# EAGLE board arduino-DIP (EAGLE 6.6.0)

Size 10.16 x 0 mm. Coordinates in mm from the lower left corner, seen from the top.
Copper layers (1*16): Top 0.0178mm / dielectric 59mil / Bottom 0.0178mm
Design rules "sunstone-2lyr_v1.0.0.3": minimum track width 6mil, minimum drill 14mil, track to track 6mil, track to pad 6mil, pad to pad 6mil, via to via 6mil, smd to smd 6mil, copper to edge 20mil, drill to drill 16mil, minimum pad ring 8mil, minimum via ring 8mil, stop-mask expansion 3mil, vias tented up to drill 50mil, thermal gap 10mil
Net classes: 0 default: width 0.254 mm, clearance 0.254 mm; 1 power: width 0.61 mm, drill 0.61 mm, clearance 0.254 mm; 2 gnd: width 0.305 mm, drill 0.559 mm, clearance 0.254 mm; 3 usbvcc: width 0.508 mm, drill 0.61 mm, clearance 0.254 mm; 4 aref: width 0.406 mm, drill 0.61 mm, clearance 0.254 mm
Holes 3.2 mm at 68.45,150.5 68.45,122.56 17.65,165.74 16.38,117.48
vRestrict: area 25.3,159 to 27.1,164.1; area 27.8,160.4 to 29.5,164.1; area 30.9,160.3 to 32,163.7; area 33.4,160.3 to 34.5,163.7; area 35.9,160.3 to 37.1,163.7; area 38.5,160.3 to 39.6,163.7; area 41.1,162.2 to 42.3,163.7; area 42.7,160 to 50,161.8; area 62.7,159.1 to 64.1,161.7; area 65.3,159.1 to 66.7,161.7; area 63.8,150.7 to 67.2,152.1; area 3,136.8 to 4.4,145; area 8.1,137.5 to 9.8,145; area 50.3,125.2 to 50.9,125.7; area 52.8,125.1 to 53.3,126; area 13.7,143.8 to 15.1,146.1; area 47.2,162.4 to 48.5,163.8; area 50,162.3 to 51.2,163.8; area 52.6,162.3 to 53.7,163.8; area 55.2,162.3 to 56.4,163.8; area 57.7,162.3 to 58.8,163.8; area 60.3,162.3 to 61.5,163.8; area 62.9,162.3 to 64,163.8; area 65.4,162.3 to 66.5,163.8; area 43.7,162.2 to 44.8,163.7; area 2.7,127.4 to 11.8,139.4

## Footprints (pad centres in the part's own frame; a part is rotated, then mirrored left to right if it is on the bottom)
1X06 = drill 0.85 pad 1.422 long: 1 -6.35,0; 2 -3.81,0; 3 -1.27,0; 4 1.27,0; 5 3.81,0; 6 6.35,0
C0603-ROUND = smd 0.898 x 1.1: 1 -0.889,0; 2 0.889,0
0603_CAP = smd 0.7 x 1: 1 -0.65,0; 2 0.65,0
0402_DIODE = smd 0.536 x 0.546: ANODE -0.433,0; CATHODE 0.433,0
MINIMELF = smd 1.4 x 1.8: A 1.7,0; C -1.7,0
L1812 = smd 1.9 x 3.4: 1 -1.95,0; 2 1.95,0
SJ = smd 1.168 x 1.6: 1 -0.762,0; 2 0.762,0
2X03 = drill 0.95 pad 1.55 octagon: 1 -2.54,-1.27; 2 -2.54,1.27; 3 0,-1.27; 4 0,1.27; 5 2.54,-1.27; 6 2.54,1.27
1X10 = drill 0.85 pad 1.422 long: 1 -11.43,0; 2 -8.89,0; 3 -6.35,0; 4 -3.81,0; 5 -1.27,0; 6 1.27,0; 7 3.81,0; 8 6.35,0; 9 8.89,0; 10 11.43,0
1X08 = drill 0.85 pad 1.422 long: 1 -8.89,0; 2 -6.35,0; 3 -3.81,0; 4 -1.27,0; 5 1.27,0; 6 3.81,0; 7 6.35,0; 8 8.89,0
MODULE_GENERIC = drill 0.991 square: 1 7.62,29.21 | drill 0.991 octagon: 2 7.62,26.67; 3 5.08,29.21; 4 5.08,26.67; 5 2.54,29.21; 6 2.54,26.67; 7 0,29.21; 8 0,26.67; 9 -2.54,29.21; 10 -2.54,26.67; 11 -5.08,29.21; 12 -5.08,26.67; 13 -7.62,29.21; 14 -7.62,26.67
USB_MICRO_B-HIROSE-ZX62-B-5PA(11) = smd 0.4 x 1.35: 1 -1.3,4.125; 2 -0.65,4.125; 3 0,4.125; 4 0.65,4.125; 5 1.3,4.125 | smd 2.1 x 2: P$1 3.1,3.8; P$2 -3.1,3.8 | smd 1.8 x 1.9: P$3 -4,1.45; P$6 4,1.45 | smd 1.9 x 1.9: P$4 -1.2,1.45; P$5 1.2,1.45
2X02 = drill 0.95 pad 1.676 octagon: 1 -1.27,-1.27; 2 -1.27,1.27; 3 1.27,-1.27; 4 1.27,1.27
1X03 = drill 1.016 long: 1 -2.54,0; 2 0,0; 3 2.54,0
CHIP-LED0805 = smd 1.2 x 1.2: A 0,-1.05; C 0,1.05
0805 = smd 1.2 x 1: 1 -1.1,0; 2 1.1,0
XFL4015 = smd 0.965 x 3.404: 1 -1.181,0; 2 1.181,0
R0603-ROUND = smd 0.898 x 1.1: 1 -0.889,0; 2 0.889,0
0603-RES = smd 0.7 x 1: 1 -0.65,0; 2 0.65,0
CAY16 = smd 0.5 x 0.65: 1 -1.2,-0.675; 2 -0.4,-0.675; 3 0.4,-0.675; 4 1.2,-0.675; 5 1.2,0.675; 6 0.4,0.675; 7 -0.4,0.675; 8 -1.2,0.675
MFS401N-2-Z = drill 0.8: 1 -5,1.25; 2 -3,1.25; 3 -1,1.25; 4 1,1.25; 5 3,1.25; 6 5,1.25; 7 -5,-1.25; 8 -3,-1.25; 9 -1,-1.25; 10 1,-1.25; 11 3,-1.25; 12 5,-1.25
EVQP2 = smd 1.676 x 0.813: P$1 -2.54,-0.87; P$2 -2.54,0.908; P$3 2.54,-0.87; P$4 2.54,0.908
MLF32 = smd 0.7 x 0.28: 1 -2.45,1.75; 2 -2.45,1.25; 3 -2.45,0.75; 4 -2.45,0.25; 5 -2.45,-0.25; 6 -2.45,-0.75; 7 -2.45,-1.25; 8 -2.45,-1.75; 17 2.45,-1.75; 18 2.45,-1.25; 19 2.45,-0.75; 20 2.45,-0.25; 21 2.45,0.25; 22 2.45,0.75; 23 2.45,1.25; 24 2.45,1.75 | smd 0.28 x 0.7: 9 -1.75,-2.45; 10 -1.25,-2.45; 11 -0.75,-2.45; 12 -0.25,-2.45; 13 0.25,-2.45; 14 0.75,-2.45; 15 1.25,-2.45; 16 1.75,-2.45; 25 1.75,2.45; 26 1.25,2.45; 27 0.75,2.45; 28 0.25,2.45; 29 -0.25,2.45; 30 -0.75,2.45; 31 -1.25,2.45; 32 -1.75,2.45 | smd 3.254 x 3.254: 33 0,0
MSOP08 = smd 0.3 x 1.2: 1 -0.976,-2.113; 2 -0.326,-2.113; 3 0.324,-2.113; 4 0.974,-2.113; 5 0.974,2.112; 6 0.324,2.112; 7 -0.326,2.112; 8 -0.976,2.112
RLT0007A = smd 0.6 x 0.25: 1 -0.9,0.75; 2 -0.9,0.25; 3 -0.9,-0.25; 4 -0.9,-0.75 | smd 1.5 x 0.3: 5 0.45,-0.6; 6 0.45,0; 7 0.45,0.6
QS = drill 0.85 pad 1.676 octagon: 1 -2.54,0; 2 2.54,0
RESONATOR = smd 0.7 x 2: 1 -1,0; 2 0,0; 3 1,0
CT/CN0603 = smd 1 x 1: 1 -1,0; 2 1,0
DIL28-3 = drill 0.85 pad 1.422 long: 1 -16.51,-3.81; 2 -13.97,-3.81; 3 -11.43,-3.81; 4 -8.89,-3.81; 5 -6.35,-3.81; 6 -3.81,-3.81; 7 -1.27,-3.81; 8 1.27,-3.81; 9 3.81,-3.81; 10 6.35,-3.81; 11 8.89,-3.81; 12 11.43,-3.81; 13 13.97,-3.81; 14 16.51,-3.81; 15 16.51,3.81; 16 13.97,3.81; 17 11.43,3.81; 18 8.89,3.81; 19 6.35,3.81; 20 3.81,3.81; 21 1.27,3.81; 22 -1.27,3.81; 23 -3.81,3.81; 24 -6.35,3.81; 25 -8.89,3.81; 26 -11.43,3.81; 27 -13.97,3.81; 28 -16.51,3.81

## Placement (x,y rotation side)
AD  6x1F-H8.5  [1X06]  59.56,117.48 0 top  (outside the outline)
C1  100n  [C0603-ROUND]  -19.18,130.18 270 top  (outside the outline)
C4  100n  [C0603-ROUND]  -9.65,159.26 180 top  (outside the outline)
C5  100n  [C0603-ROUND]  -9.65,144.65 0 top  (outside the outline)
C6  100n  [C0603-ROUND]  45.85,125.35 180 top  (outside the outline)
C7  100n  [C0603-ROUND]  -9.65,146.3 0 top  (outside the outline)
C8  1u  [C0603-ROUND]  -24.89,156.72 180 top  (outside the outline)
C9  22p  [C0603-ROUND]  -21.59,144.4 180 top  (outside the outline)
C10  10uF  [0603_CAP]  50.67,91.19 0 top  (outside the outline)
C11  22p  [C0603-ROUND]  -15.37,144.4 0 top  (outside the outline)
C12  22uF  [0603_CAP]  54.23,91.19 0 top  (outside the outline)
D1  DIODE  [0402_DIODE]  -8.76,-4.19 0 top  (outside the outline)
D2  CD1206-S01575  [MINIMELF]  61.85,142.88 270 top  (outside the outline)
D3  CD1206-S01575  [MINIMELF]  -24.51,161.04 90 top  (outside the outline)
F1  MF-MSMF050-2 500mA  [L1812]  -33.53,141.35 90 top  (outside the outline)
GROUND  [SJ]  -26.16,155.45 0 bottom  (outside the outline)
ICSP  3x2 M  [2X03]  67.31,142.88 270 top  (outside the outline)
ICSP1  3x2 M  [2X03]  96.9,169.29 180 top  (outside the outline)
IOH  10x1F-H8.5  [1X10]  32.64,165.74 180 top  (outside the outline)
IOL  8x1F-H8.5  [1X08]  57.02,165.74 180 top  (outside the outline)
J1  MODULE_GENERIC  [MODULE_GENERIC]  36.83,141.61 90 top  (outside the outline)
J4  MICRO_USB_B_HIROSE_ZX62-B-5PA(11)  [USB_MICRO_B-HIROSE-ZX62-B-5PA(11)]  5.08,0 0 top
JP2  2x2 M - NM  [2X02]  -18.03,155.96 90 top  (outside the outline)
JP5  [1X03]  40.26,89.79 0 top  (outside the outline)
L  YELLOW  [CHIP-LED0805]  -9.65,156.97 270 top  (outside the outline)
L1  BLM21  [0805]  -29.97,159.89 180 top  (outside the outline)
L2  0.47uH  [XFL4015]  46.86,91.31 0 top  (outside the outline)
ON  GREEN  [CHIP-LED0805]  60.83,151.51 270 top  (outside the outline)
POWER  8x1F-H8.5  [1X08]  39.24,117.48 0 top  (outside the outline)
R1  1M  [R0603-ROUND]  -18.54,144.4 0 top  (outside the outline)
R2  1M  [R0603-ROUND]  43.69,137.67 180 top  (outside the outline)
R3  1MΩ  [0603-RES]  57.28,91.19 0 top  (outside the outline)
RESET-EN  [SJ]  -9.65,142.11 0 top  (outside the outline)
RN1  10K  [CAY16]  -9.65,138.68 90 top  (outside the outline)
RN2  1K  [CAY16]  -9.65,154.18 270 top  (outside the outline)
RN3  22R  [CAY16]  -24.77,151.64 90 top  (outside the outline)
RN4  1K  [CAY16]  60.83,148.72 90 top  (outside the outline)
RX  YELLOW  [CHIP-LED0805]  -9.65,149.1 90 top  (outside the outline)
S1  MFS401N-2-Z  [MFS401N-2-Z]  -3.05,-10.41 0 top  (outside the outline)
S2  EVQP2  [EVQP2]  -6.22,-19.69 0 top  (outside the outline)
TX  YELLOW  [CHIP-LED0805]  -9.65,151.38 90 top  (outside the outline)
U3  ATMEGA16U2-MU(R)  [MLF32]  -17.65,149.48 90 top  (outside the outline)
U5  LMV358IDGKR  [MSOP08]  -18.54,135.13 90 top  (outside the outline)
VR1  TPS62086  [RLT0007A]  31.75,90.68 0 top  (outside the outline)
Y1  16MHz  [QS]  -18.67,140.97 180 top  (outside the outline)
Y2  CSTCE16M0V53-R0 16MHZ  [RESONATOR]  43.69,139.83 0 top  (outside the outline)
Z1  CG0603MLC-05E  [CT/CN0603]  -24.89,154.18 180 top  (outside the outline)
Z2  CG0603MLC-05E  [CT/CN0603]  -24.89,148.46 180 top  (outside the outline)
ZU4  ATMEGA328P-PU  [DIL28-3]  48.77,131.32 180 top  (outside the outline)

## Library data of the parts
AD C1 C4-C9 C11 ICSP ICSP1 IOH IOL JP2 POWER R1 R2 U3 ZU4 = SmartPrj
C10 = passives; DIGIKEY: 445-6853-1-ND
C12 = passives; DIGIKEY: 445-9077-1-ND
D1 = passives; DIGIKEY: P18981CT-ND
D2 D3 = diode
F1 = rcl; DIGIKEY: MF-MSMF050-2CT-ND
GROUND RESET-EN = jumper
J1 = signpost; DIGIKEY: S9170-ND
J4 = connector; DIGIKEY: H11634CT-ND; MOUSER: 798-ZX62-B-5PA11; NEWARK: 86P8793
JP5 = pinhead
L ON RX TX = led
L1 = wuerth-elektronik; DIGIKEY: 490-1054-1-ND
L2 = passives; COILCRAFT: XFL4015-471ME
R3 = passives
RN1 RN2 RN4 = resistor-dil
RN3 = resistor-dil; DIGIKEY: CAY16-220J4LFCT-ND
S1 = switches; DIGIKEY: 563-1568-ND
S2 = switches; DIGIKEY: P11084SCT-ND
U5 = linear
VR1 = regulators; DIGIKEY: 296-40831-1-ND
Y1 = SmartPrj; DIGIKEY: 535-9041-ND
Y2 = SmartPrj; DIGIKEY: 490-1198-1-ND
Z1 Z2 = varistor; DIGIKEY: CG0603MLC-05ECT-ND

## Nets
+3V3: C12.1 JP5.3 L2.2 POWER.4 R3.2 VR1.3 VR1.4
+5V [usbvcc]: C1.2 C6.2 C7.1 D1.CATHODE D2.C D3.C ICSP1.2 ICSP.2 POWER.2 POWER.5 RN1.3 RN1.5 RN2.2 RN2.3 RN4.3 RN4.4 U3.4 U3.32 U5.8 ZU4.7 ZU4.20
AD0: AD.1 ZU4.23
AD1: AD.2 ZU4.24
AD2: AD.3 ZU4.25
AD3: AD.4 ZU4.26
AD4/SDA: AD.5 IOH.9 ZU4.27
AD5/SCL: AD.6 IOH.10 ZU4.28
ARD_USB_D+: RN3.5 S1.8 Z1.1
ARD_USB_D-: RN3.8 S1.5 Z2.1
ARD_USB_GND [gnd]: C8.2 GROUND.2 L1.1 S1.11 U3.28
ARD_USB_VBUS [usbvcc]: D1.ANODE F1.2 S1.2
AREF [aref]: C4.2 IOH.8 ZU4.21
DTR: C5.1 RN2.4 U3.13
EXT_USB_D+: J4.3 S1.9
EXT_USB_D-: J4.2 S1.6
EXT_USB_GND: J4.5 S1.12
EXT_USB_ID: J4.4
EXT_USB_VBUS: J4.1 S1.3
GND [gnd]: C1.1 C4.1 C6.1 C7.2 C9.2 C10.2 C11.2 C12.2 GROUND.1 ICSP1.6 ICSP.6 IOH.7 J1.1 J1.14 L.C ON.C POWER.6 POWER.7 RN2.5 S1.10 S2.P$1 S2.P$3 U3.3 U3.33 U5.4 VR1.5 Y2.2 ZU4.8 ZU4.22
IO0: IOL.1 RN4.2 ZU4.2
IO1: IOL.2 RN4.1 ZU4.3
IO2: IOL.3 ZU4.4
IO3: IOL.4 ZU4.5
IO4: IOL.5 ZU4.6
IO5: IOL.6 ZU4.11
IO6: IOL.7 ZU4.12
IO7: IOL.8 ZU4.13
IO8: IOH.1 ZU4.14
IO9: IOH.2 ZU4.15
L13: RN2.8 U5.6 U5.7
M8RXD: RN4.7 U3.9
M8TXD: RN4.8 U3.8
MISO: ICSP.1 IOH.5 ZU4.18
MISO2: ICSP1.1 U3.17
MOD_5V: C10.1 J1.2 JP5.1 VR1.1 VR1.7
MOD_IN: J1.10
MOD_OUT: J1.8
MOD_PPS: J1.7
MOD_SCL: J1.5
MOD_SDA: J1.6
MOD_USB_D+: J1.11 S1.7
MOD_USB_D-: J1.12 S1.4
MOD_USB_VBUS: J1.13 S1.1
MOD_VCCIO: J1.4 JP5.2
MOSI: ICSP.4 IOH.4 ZU4.17
MOSI2: ICSP1.4 U3.16
N$1: L.A RN2.1
N$2: L2.1 VR1.6
N$3: ON.A RN4.5 RN4.6
N$35: RN2.7 RX.A
N$36: RN2.6 TX.A
PB4: JP2.1 U3.18
PB5: JP2.3 U3.19
PB6: JP2.2 U3.20
PB7: JP2.4 U3.21
POWER_GOOD: R3.1 VR1.2
RD+: RN3.4 U3.29
RD-: RN3.1 U3.30
RESET: C5.2 D2.A ICSP.5 POWER.3 RESET-EN.1 RESET-EN.2 RN1.4 S2.P$2 S2.P$4 ZU4.1
RESET2: D3.A ICSP1.5 RN1.6 U3.24
RXLED: RX.C U3.10
SCK: ICSP.3 IOH.6 U5.5 ZU4.19
SCK2: ICSP1.3 U3.15
SS: IOH.3 ZU4.16
TP_VUCAP: C8.1 U3.27
TXLED: TX.C U3.11
USBVCC [usbvcc]: F1.1 U3.31
USHIELD [gnd]: L1.2 Z1.2 Z2.2
VIN [power]: POWER.8
XT1: C9.1 R1.1 U3.1 Y1.2
XT2: C11.1 R1.2 U3.2 Y1.1
XTAL1: R2.1 Y2.3 ZU4.9
XTAL2: R2.2 Y2.1 ZU4.10

## Tracks (layer width: path | path; a pad name or v marks a point on that pad's centre or on a via)
+3V3  (6 unrouted)
+5V  (20 unrouted)
AD0  (1 unrouted)
AD1  (1 unrouted)
AD2  (1 unrouted)
AD3  (1 unrouted)
AD4/SDA  (2 unrouted)
AD5/SCL  (2 unrouted)
ARD_USB_D+  (2 unrouted)
ARD_USB_D-  (2 unrouted)
ARD_USB_GND  (4 unrouted)
ARD_USB_VBUS  (2 unrouted)
AREF  (2 unrouted)
DTR  (2 unrouted)
EXT_USB_D+  (1 unrouted)
EXT_USB_D-  (1 unrouted)
EXT_USB_GND  (1 unrouted)
EXT_USB_VBUS  (1 unrouted)
GND  (28 unrouted)
IO0  (2 unrouted)
IO1  (2 unrouted)
IO2  (1 unrouted)
IO3  (1 unrouted)
IO4  (1 unrouted)
IO5  (1 unrouted)
IO6  (1 unrouted)
IO7  (1 unrouted)
IO8  (1 unrouted)
IO9  (1 unrouted)
L13  (2 unrouted)
M8RXD  (1 unrouted)
M8TXD  (1 unrouted)
MISO  (2 unrouted)
MISO2  (1 unrouted)
MOD_5V  (4 unrouted)
MOD_USB_D+  (1 unrouted)
MOD_USB_D-  (1 unrouted)
MOD_USB_VBUS  (1 unrouted)
MOD_VCCIO  (1 unrouted)
MOSI  (2 unrouted)
MOSI2  (1 unrouted)
N$1  (1 unrouted)
N$2  (1 unrouted)
N$3  (2 unrouted)
N$35  (1 unrouted)
N$36  (1 unrouted)
PB4  (1 unrouted)
PB5  (1 unrouted)
PB6  (1 unrouted)
PB7  (1 unrouted)
POWER_GOOD  (1 unrouted)
RD+  (1 unrouted)
RD-  (1 unrouted)
RESET  (9 unrouted)
RESET2  (3 unrouted)
RXLED  (1 unrouted)
SCK  (3 unrouted)
SCK2  (1 unrouted)
SS  (1 unrouted)
TP_VUCAP  (1 unrouted)
TXLED  (1 unrouted)
USBVCC  (1 unrouted)
USHIELD  (2 unrouted)
XT1  (3 unrouted)
XT2  (3 unrouted)
XTAL1  (2 unrouted)
XTAL2  (2 unrouted)

## Text on the board
tPlace: 13 | 12 | 11 | 10 | 9 | 8 | 7 | 6 | 5 | 4 | 3 | 2 | 1 | 0 | MADE IN | ITALY | Prototype | Limited | Edition
tNames: SCL | SDA | M.Banzi | D.Cuartielles | T.Igoe | AREF | GND | G.Martino | # | # | # | # | D.Mellis | # | # | DIGITAL | [#=PWM] | TX | RX | TM | TX | Arduino | RX | UNO | www.arduino.cc | 1 | ANALOG IN | IOREF | RESET | 3V3 | 5V | GND | VIN | A0 | A1 | A2 | A3 | A4 | A5
bNames: MADE IN | designed by | MADE IN | ITALY | tinker it | ITALY | designed by | tinker it | ATMEGA328
ReferenceLC: L | TX | ON | RX
tDocu: Use of the Arduino name must be compliant with http://www.arduino.cc/en/Main/Policy
214bmp: D:/SmartProjects/Snc/a4_bn_logo2.bmp